# Altium PCB PCB.PcbDoc
Units mil, origin at the board's own origin, x right, y up, seen from the top; angles counter-clockwise.
Board outline 11290 x 5470 mil, 2 copper layers (Top Layer, Bottom Layer); 68 components, 74 nets, 188 pads, 5 vias.
Unrouted connection lines stored in the file: 61.
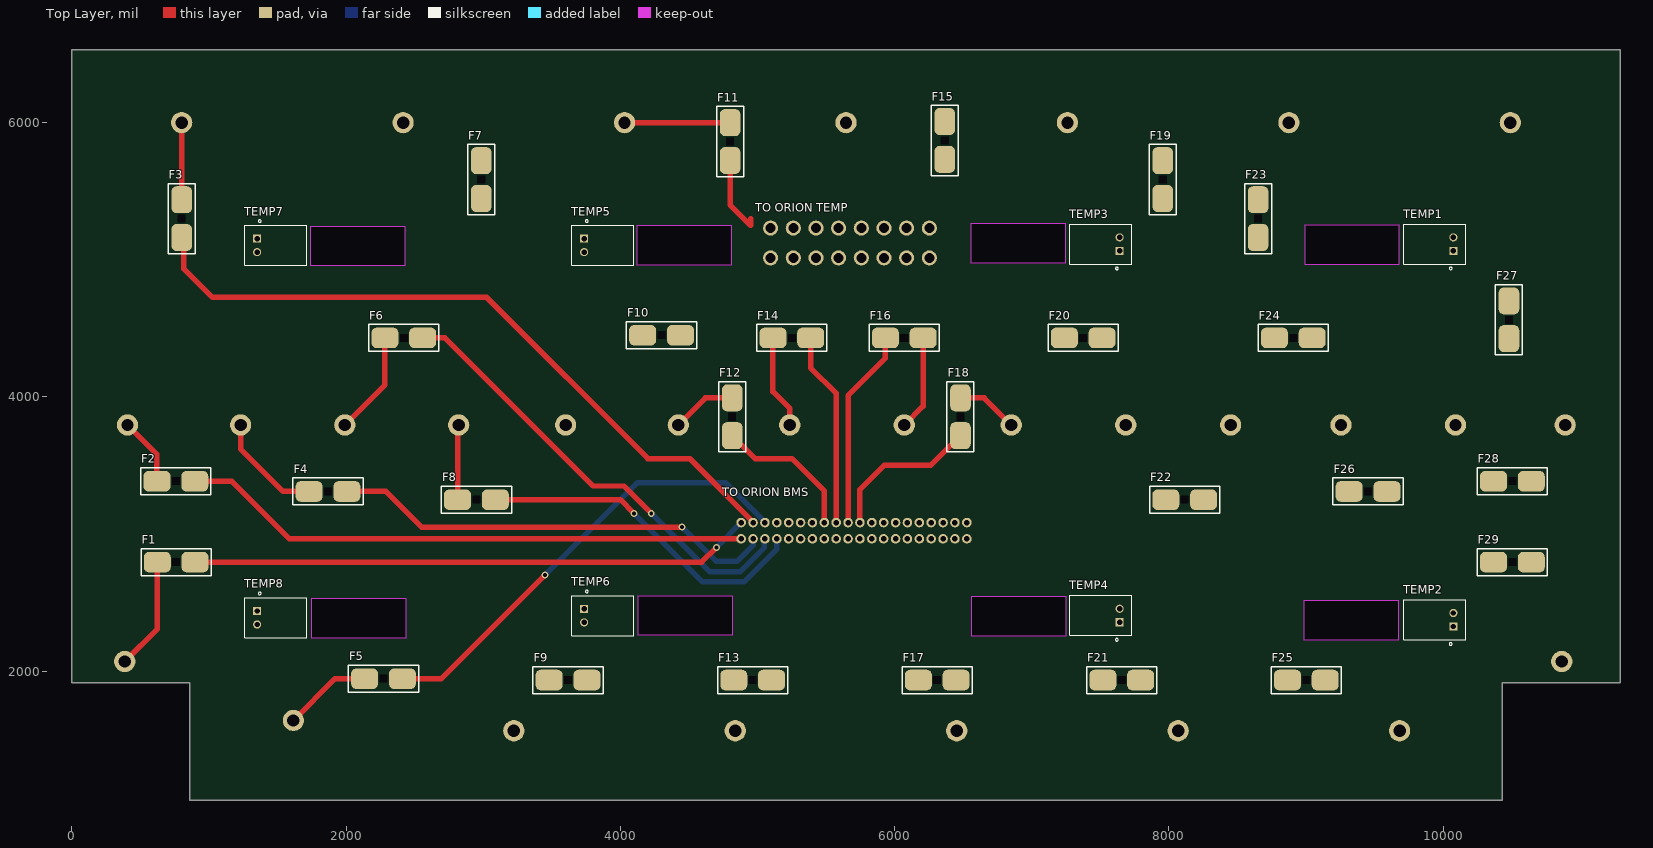
[diagram p0: Top Layer view]
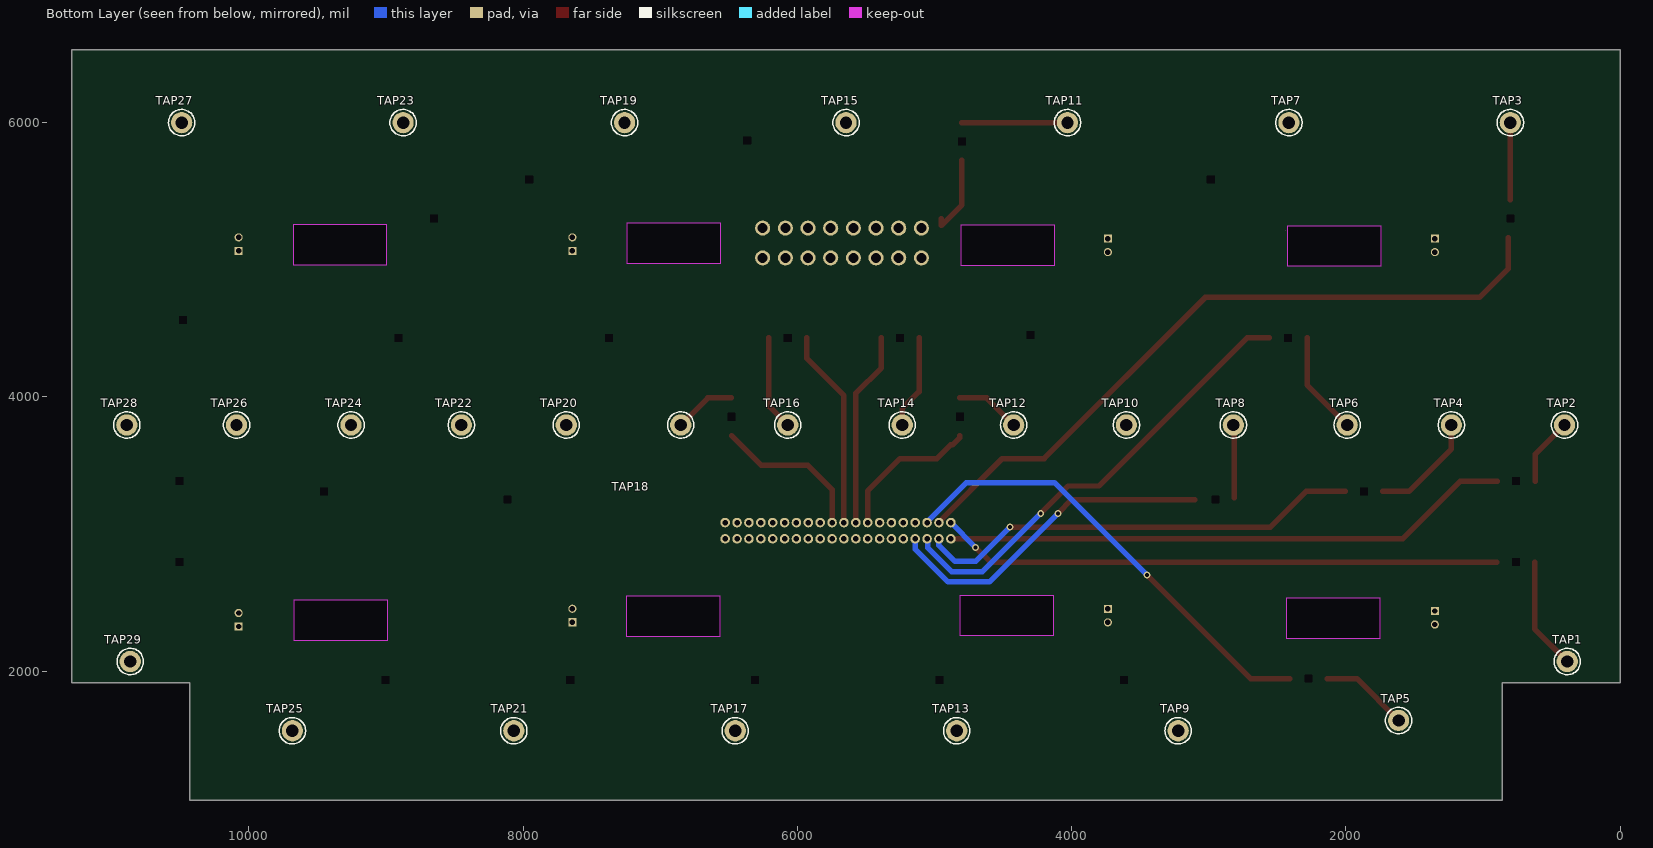
[diagram p1: Bottom Layer view, seen from below]

## Layer stack, top to bottom
Top Solder: solder mask 0.4, Solder Resist, Dk 3.5
Top Layer: signal copper 1.4
Dielectric 1: dielectric 12.6, FR-4, Dk 4.8
Bottom Layer: signal copper 1.4
Bottom Solder: solder mask 0.4, Solder Resist, Dk 3.5

## Board outline
0,1915 860,1915 860,1060 10430,1060 10430,1915 11290,1915 11290,6530 0,6530
cut-out: 8987.5,2515 9672.5,2515 9672.5,2225 8987.5,2225
cut-out: 6562.5,2545 7247.5,2545 7247.5,2255 6562.5,2255
cut-out: 8992.5,5255 9677.5,5255 9677.5,4965 8992.5,4965
cut-out: 6557.5,5265 7242.5,5265 7242.5,4975 6557.5,4975
cut-out: 1747.5,2530 2432.5,2530 2432.5,2240 1747.5,2240
cut-out: 4130,2550 4815,2550 4815,2260 4130,2260
cut-out: 4122.5,5250 4807.5,5250 4807.5,4960 4122.5,4960
cut-out: 2440,5215
cut-out: 1742.5,5245 2427.5,5245 2427.5,4955 1742.5,4955

## Design rules (kind name [scope] priority, off if disabled: settings)
Clearance [All] p1: gap=10 ignorepadtopadclearanceinfootprint=FALSE except(0: Arc-Hole Track-Hole SMDPad-Hole THPad-Hole Via-Hole Fill-Hole Poly-Hole Region-Hole Text-Hole)
PolygonConnect [All] p1: connectstyle=Relief reliefconductorwidth=10 reliefentries=4 polygonreliefangle="90 Angle" airgapwidth=10
RoutingVias [All] p1: holewidth=28 width=50 viastyle="Through Hole" minholewidth=28 minwidth=50 maxholewidth=28 maxwidth=50
SolderMaskExpansion [All] p1: expansion=4
Width [All] p1: maxlimit=50 minlimit=10 preferedwidth=40
30 further rules are at their usual default settings.

## Components (designator, comment, footprint, x,y, rotation, side; value= is the part's Value field where it differs from the comment)
F1 "0154.750DR" "Omni BLOK 0154" 760,2795 r180 top
F2 "0154.750DR" "Omni BLOK 0154" 757.8,3385 r180 top
F3 "0154.750DR" "Omni BLOK 0154" 800,5300 r90 top
F4 "0154.750DR" "Omni BLOK 0154" 1867.2,3310 r180 top
F5 "0154.750DR" "Omni BLOK 0154" 2272.2,1945 r180 top
F6 "0154.750DR" "Omni BLOK 0154" 2420,4430 r180 top
F7 "0154.750DR" "Omni BLOK 0154" 2985,5585 r90 top
F8 "0154.750DR" "Omni BLOK 0154" 2950,3250 r180 top
F9 "0154.750DR" "Omni BLOK 0154" 3618.2,1935 r180 top
F10 "0154.750DR" "Omni BLOK 0154" 4300,4450 r180 top
F11 "0154.750DR" "Omni BLOK 0154" 4800,5862.2 r90 top
F12 "0154.750DR" "Omni BLOK 0154" 4815,3855 r90 top
F13 "0154.750DR" "Omni BLOK 0154" 4964.2,1935 r180 top
F14 "0154.750DR" "Omni BLOK 0154" 5250,4430 r180 top
F15 "0154.750DR" "Omni BLOK 0154" 6365,5870 r90 top
F16 "0154.750DR" "Omni BLOK 0154" 6070,4430 r0 top
F17 "0154.750DR" "Omni BLOK 0154" 6310.2,1935 r0 top
F18 "0154.750DR" "Omni BLOK 0154" 6480,3855 r90 top
F19 "0154.750DR" "Omni BLOK 0154" 7955,5585 r90 top
F20 "0154.750DR" "Omni BLOK 0154" 7375,4430 r0 top
F21 "0154.750DR" "Omni BLOK 0154" 7656.2,1935 r0 top
F22 "0154.750DR" "Omni BLOK 0154" 8115,3250 r0 top
F23 "0154.750DR" "Omni BLOK 0154" 8650,5300 r90 top
F24 "0154.750DR" "Omni BLOK 0154" 8907.2,4430 r0 top
F25 "0154.750DR" "Omni BLOK 0154" 9002.2,1935 r0 top
F26 "0154.750DR" "Omni BLOK 0154" 9452.2,3310 r0 top
F27 "0154.750DR" "Omni BLOK 0154" 10480,4562.2 r90 top
F28 "0154.750DR" "Omni BLOK 0154" 10505,3385 r0 top
F29 "0154.750DR" "Omni BLOK 0154" 10505,2795 r0 top
TAP1 "0850-0-15-20-83-14-11-0" 0850-0-15-20-83-14-11-0 385,2070 r180 bottom
TAP2 "0850-0-15-20-83-14-11-0" 0850-0-15-20-83-14-11-0 405,3795 r180 bottom
TAP3 "0850-0-15-20-83-14-11-0" 0850-0-15-20-83-14-11-0 800,6000 r180 bottom
TAP4 "0850-0-15-20-83-14-11-0" 0850-0-15-20-83-14-11-0 1230,3795 r180 bottom
TAP5 "0850-0-15-20-83-14-11-0" 0850-0-15-20-83-14-11-0 1615,1640 r180 bottom
TAP6 "0850-0-15-20-83-14-11-0" 0850-0-15-20-83-14-11-0 1990,3795 r180 bottom
TAP7 "0850-0-15-20-83-14-11-0" 0850-0-15-20-83-14-11-0 2415,6000 r180 bottom
TAP8 "0850-0-15-20-83-14-11-0" 0850-0-15-20-83-14-11-0 2820,3795 r180 bottom
TAP9 "0850-0-15-20-83-14-11-0" 0850-0-15-20-83-14-11-0 3222.5,1565 r180 bottom
TAP10 "0850-0-15-20-83-14-11-0" 0850-0-15-20-83-14-11-0 3600,3795 r180 bottom
TAP11 "0850-0-15-20-83-14-11-0" 0850-0-15-20-83-14-11-0 4030,6000 r180 bottom
TAP12 "0850-0-15-20-83-14-11-0" 0850-0-15-20-83-14-11-0 4422.31,3795 r180 bottom
TAP13 "0850-0-15-20-83-14-11-0" 0850-0-15-20-83-14-11-0 4837.5,1565 r180 bottom
TAP14 "0850-0-15-20-83-14-11-0" 0850-0-15-20-83-14-11-0 5235,3795 r180 bottom
TAP15 "0850-0-15-20-83-14-11-0" 0850-0-15-20-83-14-11-0 5645,6000 r180 bottom
TAP16 "0850-0-15-20-83-14-11-0" 0850-0-15-20-83-14-11-0 6070,3795 r180 bottom
TAP17 "0850-0-15-20-83-14-11-0" 0850-0-15-20-83-14-11-0 6452.5,1565 r180 bottom
TAP18 "0850-0-15-20-83-14-11-0" 0850-0-15-20-83-14-11-0 6850,3795 r180 bottom
TAP19 "0850-0-15-20-83-14-11-0" 0850-0-15-20-83-14-11-0 7260,6000 r180 bottom
TAP20 "0850-0-15-20-83-14-11-0" 0850-0-15-20-83-14-11-0 7685,3795 r180 bottom
TAP21 "0850-0-15-20-83-14-11-0" 0850-0-15-20-83-14-11-0 8067.5,1565 r180 bottom
TAP22 "0850-0-15-20-83-14-11-0" 0850-0-15-20-83-14-11-0 8450,3795 r180 bottom
TAP23 "0850-0-15-20-83-14-11-0" 0850-0-15-20-83-14-11-0 8875,6000 r180 bottom
TAP24 "0850-0-15-20-83-14-11-0" 0850-0-15-20-83-14-11-0 9255,3795 r180 bottom
TAP25 "0850-0-15-20-83-14-11-0" 0850-0-15-20-83-14-11-0 9682.5,1565 r180 bottom
TAP26 "0850-0-15-20-83-14-11-0" 0850-0-15-20-83-14-11-0 10090,3795 r180 bottom
TAP27 "0850-0-15-20-83-14-11-0" 0850-0-15-20-83-14-11-0 10490,6000 r180 bottom
TAP28 "0850-0-15-20-83-14-11-0" 0850-0-15-20-83-14-11-0 10890,3795 r180 bottom
TAP29 "0850-0-15-20-83-14-11-0" 0850-0-15-20-83-14-11-0 10865,2070 r180 bottom
TEMP1 "S2B-XH-A(LF)(SN)" S2B-XH-A(LF)(SN) 10080,5114.21 r90 top
TEMP2 "S2B-XH-A(LF)(SN)" S2B-XH-A(LF)(SN) 10080,2374.78 r90 top
TEMP3 "S2B-XH-A(LF)(SN)" S2B-XH-A(LF)(SN) 7645,5114.21 r90 top
TEMP4 "S2B-XH-A(LF)(SN)" S2B-XH-A(LF)(SN) 7645,2405.79 r90 top
TEMP5 "S2B-XH-A(LF)(SN)" S2B-XH-A(LF)(SN) 3730,5105 r270 top
TEMP6 "S2B-XH-A(LF)(SN)" S2B-XH-A(LF)(SN) 3730,2404.21 r270 top
TEMP7 "S2B-XH-A(LF)(SN)" S2B-XH-A(LF)(SN) 1345,5105 r270 top
TEMP8 "S2B-XH-A(LF)(SN)" S2B-XH-A(LF)(SN) 1345,2389.21 r270 top
"TO ORION BMS" "1376113-6" 1376113-6 5746.61,2965 r0 top
"TO ORION TEMP" "39293166" 39293166 5670,5140 r180 top

## Footprints (in the part's own frame and the unit in brackets; to place one, negate y for a bottom-side part, rotate by r counter-clockwise, add the part's x,y. Pads: shape width x height; smd on the part's side, far side on the other; paste and mask are expansions set on the pad)
0850-0-15-20-83-14-11-0 [mil]
  round 155 hole 90: 1(0,0)
  silkscreen extent -96,-96 96,96, body extent -77,-76 76,76, height 221
1376113-6 [mil]
  round 70 hole 40: 1(-866.14,118.11) 2(-866.14,0) 3(-779.53,118.11) 4(-779.53,0) 5(-692.91,118.11) 6(-692.91,0) 7(-606.3,118.11) 8(-606.3,0) 9(-519.69,118.11) 10(-519.69,0) 11(-433.07,118.11) 12(-433.07,0) 13(-346.46,118.11) 14(-346.46,0) 15(-259.84,118.11) 16(-259.84,0) 17(-173.23,118.11) 18(-173.23,0) 19(-86.61,118.11) 20(-86.61,0) 21(0,118.11) 22(0,0) 23(86.61,118.11) 24(86.61,0) 25(173.23,118.11) 26(173.23,0) 27(259.84,118.11) 28(259.84,0) 29(346.46,118.11) 30(346.46,0) 31(433.07,118.11) 32(433.07,0) 33(519.69,118.11) 34(519.69,0) 35(606.3,118.11) 36(606.3,0) 37(692.91,118.11) 38(692.91,0) 39(779.53,118.11) 40(779.53,0)
  body extent -1015,-321 930,281, height 940
39293166 [mm]
  round 2.8 hole 1.85: 1(14.6,-2.3) 2(14.6,3.2) 3(10.4,-2.3) 4(10.4,3.2) 5(6.2,-2.3) 6(6.2,3.2) 7(2,-2.3) 8(2,3.2) 9(-2.2,-2.3) 10(-2.2,3.2) 11(-6.4,-2.3) 12(-6.4,3.2) 13(-10.6,-2.3) 14(-10.6,3.2) 15(-14.8,-2.3) 16(-14.8,3.2)
  body extent -17.9,-4.6 17.7,6.4, height 12.8
"Omni BLOK 0154" [mm]
  rrect50% 5x3.81 smd: 1(3.5,0) 2(-3.5,0)
  rect 0x0 hole 1.4 square unplated: 3(0,0)
  silkscreen extent -6.5,-2.5 6.5,2.5, body extent -4.93,-2.52 4.9,2.51, height 3.81
S2B-XH-A(LF)(SN) [mm]
  rect 1.508x1.508 hole 1: 1(-1.25,0.127)
  round 1.508 hole 1: 2(1.25,0.127)
  silkscreen extent -4.75,-2.17 3.7,9.33, body extent -3.68,-2.19 3.72,9.31, height 6.15

## Part data
F1 F2 F3 F4 F5 F6 F7 F8 F9 F10 F11 F12 F13 F14 F15 F16 F17 F18 F19 F20 F21 F22 F23 F24 F25 F26 F27 F28 F29: "FUSE BOARD MNT 750MA 125VAC/VDC", Digikey Part Number=F1221CT-ND, Manufacturer="LittelFuse Inc", Digikey Link=https://www.digikey.com/product-detail/en/littelfuse-inc/0154.750DR/F1221CT-ND/183370, Part Number=0154.750DR
TAP1 TAP2 TAP3 TAP4 TAP5 TAP6 TAP7 TAP8 TAP9 TAP10 TAP11 TAP12 TAP13 TAP14 TAP15 TAP16 TAP17 TAP18 TAP19 TAP20 TAP21 TAP22 TAP23 TAP24 TAP25 TAP26 TAP27 TAP28 TAP29: Digikey Part Number=ED90436-ND, Angle=90, Contact=Gold, Digikey Link=https://www.digikey.com.au/products/en?keywords=0850-0-15-20-83-14-11-0, Flange=NA, Part Number=0850-0-15-20-83-14-11-0, Pitch=NA, Positions=1, Row Spacing=NA
TEMP1 TEMP2 TEMP3 TEMP4 TEMP5 TEMP6 TEMP7 TEMP8: Digikey Part Number=455-2257-ND, Angle=90, Contact=tin, Digikey Link=https://www.digikey.com.au/products/en?keywords=S2B-XH-A(LF)(SN), Part Number=S2B-XH-A(LF)(SN), Pitch=2.5, Positions=2, Row Spacing=na
"TO ORION TEMP": "8*2", Digikey Part Number=WM3850-ND, Angle=0, Contact=Tin, Flange=No, Part Number=39293166, Pitch=4.2mm, Positions=24, Row Spacing=5.5mm

## Via types
v1: diameter 50, hole 28, Top Layer to Bottom Layer, 5 vias

## Nets (pads, with @x,y where several pads share a name; then routed paths per layer and width w, separated by ;. In a path a pad name is that pad's centre, name@x,y a point inside that pad or via, vN(x,y) a via of type N, cw(c..) or ccw(c..) an arc to the next point about the centre after c; other vN are vias at no path point)
1: "TO ORION BMS.1" F1.2 | length 4102
  Top Layer w40: F1.2 4592.36,2795 v1(4700,2902.64)
  Bottom Layer w40: v1(4700,2902.64) 4880.47,3083.11
2: "TO ORION BMS.2" F2.2 | length 4158.9
  Top Layer w40: F2.2 1165,3385 1585,2965 4880.47,2965
3: "TO ORION BMS.3" F3.2 | length 5149.5
  Top Layer w40: F3.2@815,5162.2 815,4935 1025,4725 3025,4725 4200,3550 4505.51,3550 4967.09,3088.42 4967.09,3083.11
4: "TO ORION BMS.4" F4.2 | length 3269.7
  Top Layer w40: F4.2 2290,3310 2550,3050 v1(4450,3050)
  Bottom Layer w40: v1(4450,3050) 4700,2800 4850,2800 4967.09,2917.09 4967.09,2965
5: "TO ORION BMS.5" F5.2 | length 3360
  Top Layer w40: F5.2 2695,1945 v1(3450,2700)
  Bottom Layer w40: v1(3450,2700) 4125,3375 4767.12,3375 5053.7,3088.42 5053.7,3083.11
6: "TO ORION BMS.6" F6.2 | length 3337.5
  Top Layer w40: F6.2 2720,4430 3800,3350 4025,3350 v1(4225,3150)
  Bottom Layer w40: v1(4225,3150) 4650,2725 4875,2725 5047.96,2897.96 5047.96,2959.26 5053.7,2965
7: "TO ORION BMS.7" F7.2
8: "TO ORION BMS.8" F8.2 | length 2462.5
  Top Layer w40: F8.2@3100.59,3250 4000,3250 v1(4100,3150)
  Bottom Layer w40: v1(4100,3150) 4600,2650 4900,2650 5140.31,2890.32 5140.31,2965
9: "TO ORION BMS.9" F9.2
10: "TO ORION BMS.10" F10.2
11: "TO ORION BMS.11" "TO ORION BMS.12" "TO ORION BMS.13" "TO ORION BMS.14" F11.2 | length 586.5
  Top Layer w40: F11.2 4800,5400 4950,5250 4950,5300
12: "TO ORION BMS.15" F12.2 | length 1077.4
  Top Layer w40: F12.2 4815,3703.25 4868.67,3649.58 4882.62,3649.58 4982.2,3550 5250,3550 5486.77,3313.23 5486.77,3083.11
13: "TO ORION BMS.16" F13.2
14: "TO ORION BMS.17" F14.2 | length 1423.8
  Top Layer w40: F14.2 5387.8,4212.2 5573.39,4026.61 5573.39,3083.11
15: "TO ORION BMS.18" F15.2
16: "TO ORION BMS.19" F16.2 | length 1459.6
  Top Layer w40: 5660,3083.11 5660,4010 5932.2,4282.2 F16.2
17: "TO ORION BMS.20" F17.2
18: "TO ORION BMS.21" F18.2 | length 1136.7
  Top Layer w40: 5746.61,3083.11 5746.61,3323.18 5923.43,3500 6262.8,3500 F18.2
19: "TO ORION BMS.22" F19.2
20: "TO ORION BMS.23" F20.2
21: "TO ORION BMS.24" "TO ORION BMS.25" "TO ORION BMS.26" "TO ORION BMS.28" F21.2
22: "TO ORION BMS.29" F22.2
23: "TO ORION BMS.30" F23.2
24: "TO ORION BMS.31" F24.2
25: "TO ORION BMS.32" F25.2
26: "TO ORION BMS.33" F26.2
27: "TO ORION BMS.34" F27.2
28: "TO ORION BMS.35" F28.2
29: "TO ORION BMS.36" "TO ORION BMS.37" "TO ORION BMS.38" "TO ORION BMS.39" "TO ORION BMS.40" F29.2
NetF1_1: F1.1 TAP1.1 | length 823.3
  Top Layer w40: TAP1.1 622.2,2307.2 F1.1
NetF2_1: F2.1 TAP2.1 | length 499.1
  Top Layer w40: TAP2.1 620,3580 F2.1
NetF3_1: F3.1 TAP3.1 | length 562.2
  Top Layer w40: F3.1 TAP3.1
NetF4_1: F4.1 TAP4.1 | length 802.8
  Top Layer w40: TAP4.1 1230,3620 1540,3310 F4.1
NetF5_1: F5.1 TAP5.1 | length 645.7
  Top Layer w40: TAP5.1 1920,1945 F5.1
NetF6_1: F6.1 TAP6.1 | length 756
  Top Layer w40: TAP6.1 2282.2,4087.2 F6.1
NetF7_1: F7.1 TAP7.1
NetF8_1: F8.1 TAP8.1 | length 535.4
  Top Layer w40: F8.1@2812.2,3262.8 2812.2,3787.2 TAP8.1
NetF9_1: F9.1 TAP9.1
NetF10_1: F10.1 TAP10.1 | length 5.6
  Bottom Layer w40: TAP10.1 TAP10.1@3600,3800.59
NetF11_1: F11.1 TAP11.1 | length 770
  Top Layer w40: TAP11.1 F11.1
NetF12_1: F12.1 TAP12.1 | length 474.6
  Top Layer w40: TAP12.1 4620.1,3992.8 F12.1
NetF13_1: F13.1 TAP13.1
NetF14_1: F14.1 TAP14.1 | length 685.9
  Top Layer w40: F14.1 5112.2,4037.8 5235,3915 TAP14.1
NetF15_1: F15.1 TAP15.1
NetF16_1: F16.1 TAP16.1 | length 692.1
  Top Layer w40: TAP16.1 6207.8,3932.8 F16.1
NetF17_1: F17.1 TAP17.1
NetF18_1: F18.1 TAP18.1 | length 451.9
  Top Layer w40: F18.1 6652.2,3992.8 TAP18.1
NetF19_1: F19.1 TAP19.1
NetF20_1: F20.1 TAP20.1
NetF21_1: F21.1 TAP21.1
NetF22_1: F22.1 TAP22.1
NetF23_1: F23.1 TAP23.1
NetF24_1: F24.1 TAP24.1
NetF25_1: F25.1 TAP25.1
NetF26_1: F26.1 TAP26.1
NetF27_1: F27.1 TAP27.1
NetF28_1: F28.1 TAP28.1
NetF29_1: F29.1 TAP29.1
TEMP+1: "TO ORION TEMP.2" TEMP1.1
TEMP+2: "TO ORION TEMP.4" TEMP2.1
TEMP+3: "TO ORION TEMP.6" TEMP3.1
TEMP+4: "TO ORION TEMP.8" TEMP4.1
TEMP+5: "TO ORION TEMP.10" TEMP5.1
TEMP+6: "TO ORION TEMP.12" TEMP6.1
TEMP+7: "TO ORION TEMP.14" TEMP7.1
TEMP+8: "TO ORION TEMP.16" TEMP8.1
TEMP-1: "TO ORION TEMP.1" TEMP1.2
TEMP-2: "TO ORION TEMP.3" TEMP2.2
TEMP-3: "TO ORION TEMP.5" TEMP3.2
TEMP-4: "TO ORION TEMP.7" TEMP4.2
TEMP-5: "TO ORION TEMP.9" TEMP5.2
TEMP-6: "TO ORION TEMP.11" TEMP6.2
TEMP-7: "TO ORION TEMP.13" TEMP7.2
TEMP-8: "TO ORION TEMP.15" TEMP8.2
pads on no net: "TO ORION BMS.27" F1.3 F2.3 F3.3 F4.3 F5.3 F6.3 F7.3 F8.3 F9.3 F10.3 F11.3 F12.3 F13.3 F14.3 F15.3 F16.3 F17.3 F18.3 F19.3 F20.3 F21.3 F22.3 F23.3 F24.3 F25.3 F26.3 F27.3 F28.3 F29.3